# EAGLE board Differential driver (EAGLE 7.6.0)
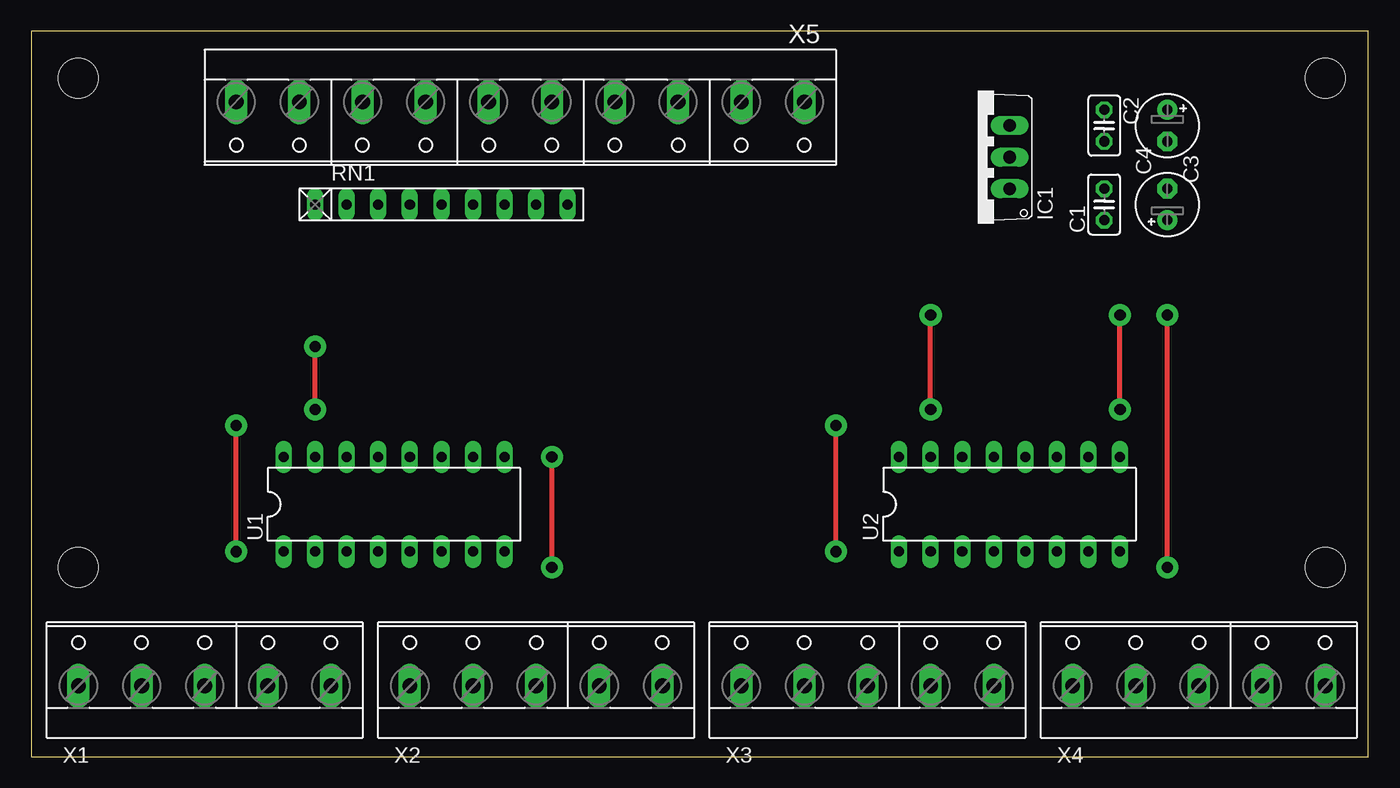
[diagram p0: board, top side]
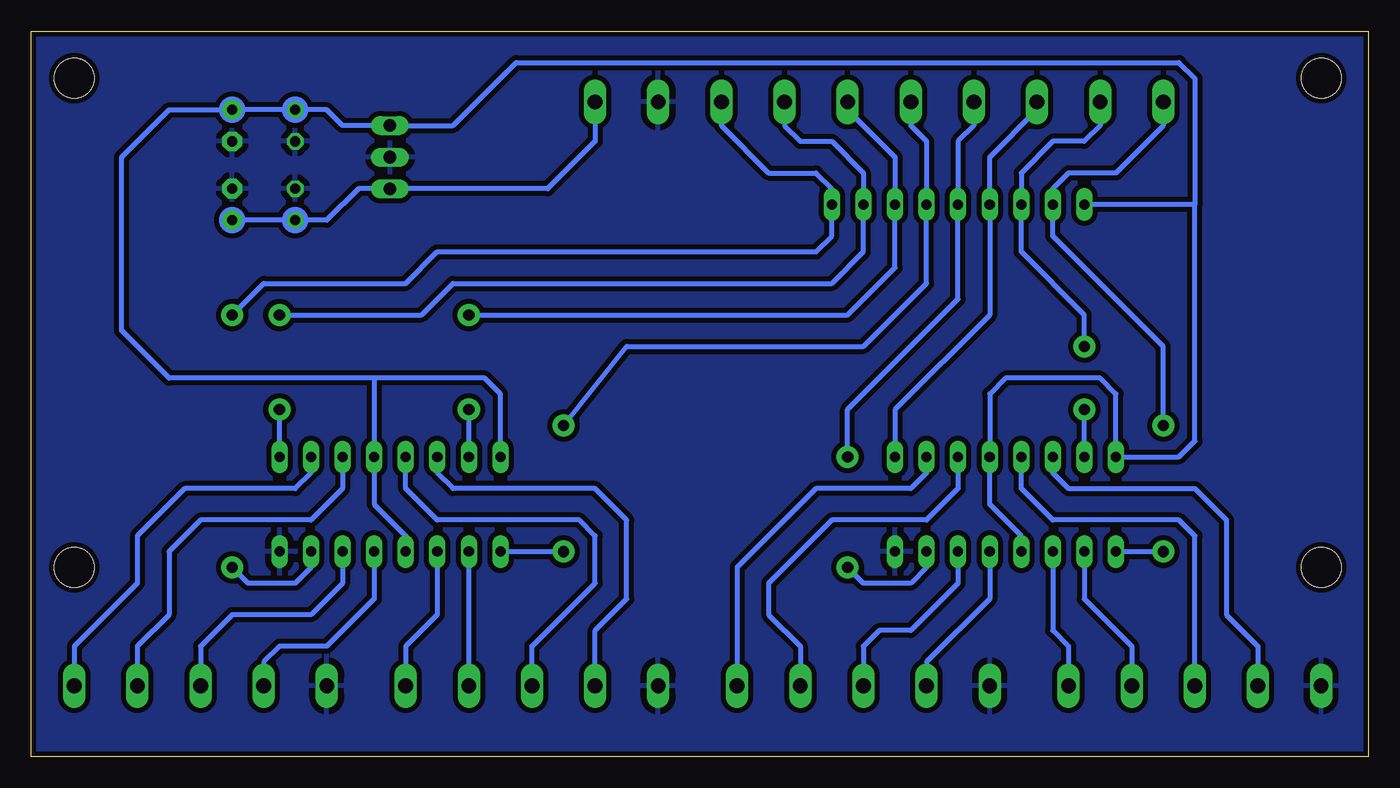
[diagram p1: board, bottom side, seen from below]

Size 107.62 x 58.41 mm. Coordinates in mm from the lower left corner, seen from the top.
Outline: 0,0 107.62,0 107.62,58.41 0,58.41 0,0
Copper layers (1*16): Top 0.035mm / dielectric 1.5mm / Bottom 0.035mm
Design rules "default *": minimum track width 20mil, minimum drill 24mil, track to track 16mil, track to pad 16mil, pad to pad 20mil, via to via 20mil, smd to smd 8mil, copper to edge 16mil, drill to drill 8mil, minimum pad ring 10mil, minimum via ring 8mil, stop-mask expansion 4mil, vias tented up to drill 0mil, thermal gap 20mil
Holes 3.2 mm at 3.81,15.24 104.14,15.24 104.14,54.61 3.81,54.61

## Footprints (pad centres in the part's own frame; a part is rotated, then mirrored left to right if it is on the bottom)
C025-025X050 = drill 0.813 octagon: 1 -1.27,0; 2 1.27,0
E2,5-5 = drill 0.813 pad 1.6: + -1.27,0 | drill 0.813 pad 1.6 octagon: - 1.27,0
TO220V = drill 1.016 long: 1 -2.54,-2.54; 2 0,-2.54; 3 2.54,-2.54
RN-9 = drill 0.813 long: 1 -10.16,0; 2 -7.62,0; 3 -5.08,0; 4 -2.54,0; 5 0,0; 6 2.54,0; 7 5.08,0; 8 7.62,0; 9 10.16,0
DIL16 = drill 0.813 long: 1 -8.89,-3.81; 2 -6.35,-3.81; 3 -3.81,-3.81; 4 -1.27,-3.81; 5 1.27,-3.81; 6 3.81,-3.81; 7 6.35,-3.81; 8 8.89,-3.81; 9 8.89,3.81; 10 6.35,3.81; 11 3.81,3.81; 12 1.27,3.81; 13 -1.27,3.81; 14 -3.81,3.81; 15 -6.35,3.81; 16 -8.89,3.81
W237-5P = drill 1.194 long: 1 -10.16,-0.635; 2 -5.08,-0.635; 3 0,-0.635; 4 5.08,-0.635; 5 10.16,-0.635
W237-10P = drill 1.194 long: 1 -22.86,-0.635; 2 -17.78,-0.635; 3 -12.7,-0.635; 4 -7.62,-0.635; 5 -2.54,-0.635; 6 2.54,-0.635; 7 7.62,-0.635; 8 12.7,-0.635; 9 17.78,-0.635; 10 22.86,-0.635

## Placement (x,y rotation side)
C1  [C025-025X050]  86.36,44.45 90 top
C2  [C025-025X050]  86.36,50.8 270 top
C3  [E2,5-5]  91.44,50.8 270 top
C4  [E2,5-5]  91.44,44.45 90 top
IC1  7805TV  [TO220V]  76.2,48.26 90 top
RN1  [RN-9]  33.02,44.45 0 top
U1  SN75174N  [DIL16]  29.21,20.32 0 top
U2  SN75174N  [DIL16]  78.74,20.32 0 top
X1  [W237-5P]  13.97,6.35 0 top
X2  [W237-5P]  40.64,6.35 0 top
X3  [W237-5P]  67.31,6.35 0 top
X4  [W237-5P]  93.98,6.35 0 top
X5  [W237-10P]  39.37,52.07 180 top

## Library data of the parts
C1-C4 = rcl
IC1 = linear
RN1 = resistor-net; OC_FARNELL: unknown; OC_NEWARK: unknown
U1 U2 = texas; MPN: SN75174N; OC_FARNELL: 1106026; OC_NEWARK: 60K6927; PACKAGE: PDIP-16; SUPPLIER: Texas Instruments
X1-X5 = con-wago-508; OC_FARNELL: unknown; OC_NEWARK: unknown

## Nets
+5V: C2.1 C3.+ IC1.3 RN1.1 U1.4 U1.12 U1.16 U2.4 U2.12 U2.16
+24V: C1.1 C4.+ IC1.1 X5.1
A_DIR: RN1.9 U2.7 X5.3
A_DIR+: U2.6 X4.3
A_DIR-: U2.5 X4.2
A_STEP: RN1.8 U2.9 X5.4
A_STEP+: U2.10 X4.5
A_STEP-: U2.11 X4.4
GND: C1.2 C2.2 C3.- C4.- IC1.2 U1.8 U2.8 X1.1 X2.1 X3.1 X4.1 X5.2
X_DIR: RN1.3 U1.15 X5.9
X_DIR+: U1.14 X1.2
X_DIR-: U1.13 X1.3
X_STEP: RN1.2 U1.1 X5.10
X_STEP+: U1.2 X1.4
X_STEP-: U1.3 X1.5
Y_DIR: RN1.5 U1.7 X5.7
Y_DIR+: U1.6 X2.3
Y_DIR-: U1.5 X2.2
Y_STEP: RN1.4 U1.9 X5.8
Y_STEP+: U1.10 X2.5
Y_STEP-: U1.11 X2.4
Z_DIR: RN1.7 U2.15 X5.5
Z_DIR+: U2.14 X3.2
Z_DIR-: U2.13 X3.3
Z_STEP: RN1.6 U2.1 X5.6
Z_STEP+: U2.2 X3.4
Z_STEP-: U2.3 X3.5

## Tracks (layer width: path | path; a pad name or v marks a point on that pad's centre or on a via)
+5V
  Bottom 0.406: U1.4 27.94,17.78 30.48,20.32 U1.12 30.48,29.21 29.21,30.48 21.59,30.48 20.32,29.21 U1.16 15.24,24.13 13.97,25.4 13.97,44.45 | 13.97,44.45 RN1.1 | 13.97,44.45 13.97,54.61 15.24,55.88 68.58,55.88 73.66,50.8 IC1.3 82.55,50.8 83.82,52.07 C2.1 C3.+ 96.52,52.07 100.33,48.26 100.33,34.29 96.52,30.48 80.01,30.48 | U2.4 77.47,17.78 80.01,20.32 U2.12 80.01,30.48 | U2.16 69.85,29.21 71.12,30.48 80.01,30.48
+24V
  Bottom 0.406: X5.1 62.23,49.53 66.04,45.72 IC1.1 81.28,45.72 83.82,43.18 C1.1 C4.+
A_DIR  (via drill 0.8 pad 1.78, 0.9 pad 1.68)
  Top 0.406: v91.44,15.24 v91.44,35.56
  Bottom 0.406: U2.7 85.09,15.24 86.36,13.97 90.17,13.97 v91.44,15.24 | v91.44,35.56 88.9,38.1 77.47,38.1 74.93,40.64 44.45,40.64 43.18,41.91 RN1.9 43.18,45.72 44.45,46.99 48.26,46.99 52.07,50.8 X5.3
A_DIR+
  Bottom 0.406: U2.6 82.55,13.97 85.09,11.43 91.44,11.43 93.98,8.89 X4.3
A_DIR-
  Bottom 0.406: U2.5 80.01,12.7 83.82,8.89 87.63,8.89 88.9,7.62 X4.2
A_STEP  (via drill 0.8 pad 1.78, 0.9 pad 1.78)
  Top 0.406: v87.63,27.94 v87.63,35.56
  Bottom 0.406: v87.63,35.56 76.2,35.56 73.66,38.1 43.18,38.1 40.64,40.64 RN1.8 40.64,46.99 43.18,49.53 45.72,49.53 46.99,50.8 X5.4 | U2.9 v87.63,27.94
A_STEP+
  Bottom 0.406: U2.10 85.09,22.86 86.36,21.59 95.25,21.59 99.06,17.78 99.06,13.97 104.14,8.89 X4.5
A_STEP-
  Bottom 0.406: U2.11 82.55,21.59 85.09,19.05 93.98,19.05 96.52,16.51 96.52,11.43 99.06,8.89 X4.4
GND
  pour Bottom: 0,58.42 107.95,58.42 107.95,0 0,0
X_DIR  (via drill 0.8 pad 1.78, 0.9 pad 1.68)
  Top 0.406: v22.86,27.94 v22.86,33.02
  Bottom 0.406: U1.15 v22.86,27.94 | v22.86,33.02 22.86,35.56 27.94,40.64 RN1.3 27.94,46.99 25.4,49.53 22.86,49.53 21.59,50.8 X5.9
X_DIR+
  Bottom 0.406: U1.14 25.4,22.86 24.13,21.59 13.97,21.59 11.43,19.05 11.43,11.43 8.89,8.89 X1.2
X_DIR-
  Bottom 0.406: U1.13 27.94,21.59 25.4,19.05 15.24,19.05 13.97,17.78 X1.3
X_STEP  (via drill 0.8 pad 1.78, 0.9 pad 1.68)
  Top 0.406: v16.51,16.51 v16.51,26.67
  Bottom 0.406: U1.1 v16.51,16.51 | v16.51,26.67 16.51,33.02 25.4,41.91 RN1.2 25.4,45.72 24.13,46.99 20.32,46.99 16.51,50.8 X5.10
X_STEP+
  Bottom 0.406: U1.2 22.86,12.7 19.05,8.89 X1.4
X_STEP-
  Bottom 0.406: U1.3 25.4,10.16 24.13,8.89 X1.5
Y_DIR  (via drill 0.8 pad 1.78, 0.9 pad 1.68)
  Top 0.406: v41.91,15.24 v41.91,24.13
  Bottom 0.406: X5.7 31.75,50.8 33.02,49.53 RN1.5 33.02,36.83 41.91,27.94 v41.91,24.13 | U1.7 35.56,15.24 36.83,13.97 40.64,13.97 v41.91,15.24
Y_DIR+
  Bottom 0.406: U1.6 33.02,13.97 36.83,10.16 39.37,10.16 40.64,8.89 X2.3
Y_DIR-
  Bottom 0.406: U1.5 30.48,12.7 35.56,7.62 X2.2
Y_STEP
  Bottom 0.406: X5.8 26.67,52.07 30.48,48.26 RN1.4 30.48,35.56 38.1,27.94 U1.9
Y_STEP+
  Bottom 0.406: U1.10 35.56,22.86 36.83,21.59 44.45,21.59 50.8,15.24 X2.5
Y_STEP-
  Bottom 0.406: U1.11 33.02,21.59 35.56,19.05 43.18,19.05 48.26,13.97 48.26,11.43 45.72,8.89 X2.4
Z_DIR  (via drill 0.8 pad 1.78, 0.9 pad 1.78)
  Top 0.406: v72.39,27.94 v72.39,35.56
  Bottom 0.406: X5.5 41.91,52.07 38.1,48.26 RN1.7 38.1,39.37 41.91,35.56 v72.39,35.56 | U2.15 v72.39,27.94
Z_DIR+
  Bottom 0.406: X3.2 62.23,10.16 59.69,12.7 59.69,19.05 62.23,21.59 73.66,21.59 74.93,22.86 U2.14
Z_DIR-
  Bottom 0.406: X3.3 67.31,8.89 62.23,13.97 62.23,17.78 63.5,19.05 74.93,19.05 77.47,21.59 U2.13
Z_STEP  (via drill 0.8 pad 1.78, 0.9 pad 1.68)
  Top 0.406: v64.77,16.51 v64.77,26.67
  Bottom 0.406: X5.6 36.83,50.8 35.56,49.53 RN1.6 35.56,38.1 40.64,33.02 59.69,33.02 v64.77,26.67 | U2.1 v64.77,16.51
Z_STEP+
  Bottom 0.406: X3.4 U2.2
Z_STEP-
  Bottom 0.406: U2.3 74.93,11.43 77.47,8.89 X3.5
(copper drawn outside any net)
  shapes: Bottom circle x4